# EAGLE board LFO_CGS (EAGLE 7.3.0)

Size 39.3 x 106.5 mm. Coordinates in mm from the lower left corner, seen from the top.
Outline: 0,0 39.3,0 39.3,106.5 0,106.5 0,0
Copper layers (1*16): Top 0.035mm / dielectric 1.5mm / Bottom 0.035mm
Design rules "default": minimum track width 10mil, minimum drill 24mil, track to track 8mil, track to pad 8mil, pad to pad 8mil, via to via 8mil, smd to smd 8mil, copper to edge 40mil, drill to drill 8mil, minimum pad ring 10mil, minimum via ring 8mil, stop-mask expansion 4mil, vias tented up to drill 0mil, thermal gap 10mil

## Footprints (pad centres in the part's own frame; a part is rotated, then mirrored left to right if it is on the bottom)
C025-025X050 = drill 0.813 octagon: 1 -1.27,0; 2 1.27,0
E2,5-6 = drill 0.813 pad 1.6: + -1.27,0 | drill 0.813 pad 1.6 octagon: - 1.27,0
DO35-7 = drill 0.813: A 3.81,0 | drill 0.813 square: C -3.81,0
LED3MM = drill 0.9: A -1.27,0 | drill 0.9 square: K 1.27,0
DO41-1 = drill 0.9: A 1.27,0 | drill 0.9 square: C -1.27,0
JK16-03-11 = drill 0.8: P$1 -2.54,0; P$2 2.54,0
WQP-PJ301M-12_JACK = drill 1.1: P$1_TIP 0,5; P$2_SWITCH 0,-3.5; P$3_SLEEVE 0,-6.5
VERTICAL_RESISTOR = drill 0.813 octagon: 1 -1.27,0; 2 1.27,0
EURO_PWR_HEADER_FAT = drill 1.016 pad 1.88 octagon: 1 -5.08,-1.27; 2 -5.08,1.27; 3 -2.54,-1.27; 4 -2.54,1.27; 5 0,-1.27; 6 0,1.27; 7 2.54,-1.27; 8 2.54,1.27; 9 5.08,-1.27; 10 5.08,1.27
TO92 = drill 0.813 octagon: 1 1.27,0; 2 0,1.905; 3 -1.27,0
DIL14 = drill 0.813 long: 1 -7.62,-3.81; 2 -5.08,-3.81; 3 -2.54,-3.81; 4 0,-3.81; 5 2.54,-3.81; 6 5.08,-3.81; 7 7.62,-3.81; 8 7.62,3.81; 9 5.08,3.81; 10 2.54,3.81; 11 0,3.81; 12 -2.54,3.81; 13 -5.08,3.81; 14 -7.62,3.81
DIL08 = drill 0.813 pad 1.27 long: 1 -3.81,-3.81; 2 -1.27,-3.81; 3 1.27,-3.81; 4 3.81,-3.81; 5 3.81,3.81; 6 1.27,3.81; 7 -1.27,3.81; 8 -3.81,3.81
9MM_SNAP-IN_POT = drill 1.1 square: 1 -2.5,-7 | drill 1.1 octagon: 2 0,-7; 3 2.5,-7 | drill 2.1 square: CHASSIS1 -4.5,0; CHASSIS2 4.5,0

## Placement (x,y rotation side)
C1  47n  [C025-025X050]  5.08,35.56 180 top
C2  100n  [C025-025X050]  5.08,53.34 0 top
C3  100n  [C025-025X050]  12.7,53.34 0 top
C4  100n  [C025-025X050]  26.67,53.34 0 top
C5  100n  [C025-025X050]  33.02,53.34 0 top
C6  [E2,5-6]  33.02,93.98 180 top
C7  [E2,5-6]  8.89,92.71 180 top
D1  1N4148  [DO35-7]  7.62,66.04 180 top
D2  1N4148  [DO35-7]  29.21,66.04 0 top
D3  LED3MM  [LED3MM]  15.24,92.71 0 top
D4  [DO41-1]  33.02,88.9 0 top
D5  [DO41-1]  8.89,87.63 0 top
F1  JK16-03-11  [JK16-03-11]  33.02,99.06 0 top
F2  JK16-03-11  [JK16-03-11]  7.62,99.06 180 top
PULSE  THONKICONNNEW  [WQP-PJ301M-12_JACK]  17.78,22.86 0 top
R1  150k  [VERTICAL_RESISTOR]  19.05,53.34 0 top
R2  2k2  [VERTICAL_RESISTOR]  20.32,31.75 0 top
R3  1k  [VERTICAL_RESISTOR]  5.08,30.48 0 top
R4  100k  [VERTICAL_RESISTOR]  29.21,35.56 0 top
R5  4k7  [VERTICAL_RESISTOR]  3.81,86.36 270 top
R6  10k  [VERTICAL_RESISTOR]  13.97,35.56 0 top
R7  1k  [VERTICAL_RESISTOR]  27.94,31.75 0 top
R8  1k  [VERTICAL_RESISTOR]  22.23,92.71 0 top
R9  1k  [VERTICAL_RESISTOR]  27.94,21.59 180 top
R10  100k  [VERTICAL_RESISTOR]  35.56,83.82 270 top
R11  47k  [VERTICAL_RESISTOR]  12.7,31.75 0 top
R12  100k  [VERTICAL_RESISTOR]  21.59,36.2 180 top
R13  1k  [VERTICAL_RESISTOR]  15.24,86.36 180 top
R14  1k  [VERTICAL_RESISTOR]  7.62,21.59 0 top
R15  1k  [VERTICAL_RESISTOR]  21.59,86.36 0 top
SQUARE  THONKICONNNEW  [WQP-PJ301M-12_JACK]  7.62,7.62 0 top
SV1  EURO_POWER_HEADERFAT_PADS  [EURO_PWR_HEADER_FAT]  19.05,100.33 0 top
T1  BC547  [TO92]  27.94,86.36 0 top
TRI/SAW  THONKICONNNEW  [WQP-PJ301M-12_JACK]  19.05,7.62 0 top
U1  TL074_  [DIL14]  11.43,44.45 0 top
U2  TL072_  [DIL08]  29.21,44.45 0 top
VARI  THONKICONNNEW  [WQP-PJ301M-12_JACK]  30.48,7.62 0 top
VR1_SPEED  B100k  [9MM_SNAP-IN_POT]  7.62,76.2 0 top
VR2_SHAPE  B500k  [9MM_SNAP-IN_POT]  29.21,76.2 0 top
VR2_VARI  B100k  [9MM_SNAP-IN_POT]  19.05,62.23 0 top

## Library data of the parts
C1-C7 = resistor
D1 D2 PULSE R1-R15 SQUARE SV1 T1 TRI/SAW U1 U2 VARI VR1_SPEED VR2_SHAPE VR2_VARI = MusicThingModular
D3-D5 = gm-diodes
F1 F2 = ptc-littlefuse

## Nets
GND: C2.1 C3.2 C4.1 C5.2 C6.- C7.+ D3.K D4.C D5.A PULSE.P$3_SLEEVE R3.1 R5.1 R8.1 R12.1 R15.1 SQUARE.P$3_SLEEVE SV1.3 SV1.4 SV1.5 SV1.6 SV1.7 SV1.8 T1.3 TRI/SAW.P$3_SLEEVE U1.3 U1.9 U1.12 VARI.P$3_SLEEVE
N$1: R1.1 U1.10
N$2: R1.2 R2.2 U1.8 VR1_SPEED.3
N$3: PULSE.P$1_TIP R2.1 R3.2
N$4: R5.2 VR1_SPEED.1
N$5: D1.A D2.C VR1_SPEED.2
N$6: D1.C VR2_SHAPE.1
N$7: D2.A VR2_SHAPE.3
N$8: C1.1 R6.2 U1.2
N$9: R6.1 VR2_SHAPE.2
N$10: C1.2 R4.2 R7.2 R10.1 T1.2 U1.1 VR2_VARI.3
N$11: R7.1 R8.2 TRI/SAW.P$1_TIP
N$12: R11.1 U1.14
N$13: R10.2 U1.13
N$14: R11.2 R12.2 U1.5
N$15: R14.2 U1.6 U1.7 VR2_VARI.1
N$16: R14.1 R15.2 SQUARE.P$1_TIP
N$17: D3.A R13.2
N$18: U2.3 VR2_VARI.2
N$19: R9.2 U2.1 U2.2
N$20: R9.1 VARI.P$1_TIP
N$21: R13.1 T1.1
N$22: F2.P$1 SV1.1
N$23: F1.P$1 SV1.9
N$24: C3.1 C5.1 C7.- D5.C F2.P$2 U1.11 U2.4
N$25: SV1.2
N$28: C2.2 C4.2 C6.+ D4.A F1.P$2 U1.4 U2.8
N$29: SV1.10

## Tracks (layer width: path | path; a pad name or v marks a point on that pad's centre or on a via)
GND  (27 unrouted)
N$1  (1 unrouted)
N$2  (3 unrouted)
N$3  (2 unrouted)
N$4  (1 unrouted)
N$5  (2 unrouted)
N$6  (1 unrouted)
N$7  (1 unrouted)
N$8  (2 unrouted)
N$9  (1 unrouted)
N$10  (6 unrouted)
N$11  (2 unrouted)
N$12  (1 unrouted)
N$13  (1 unrouted)
N$14  (2 unrouted)
N$15  (3 unrouted)
N$16  (2 unrouted)
N$17  (1 unrouted)
N$18  (1 unrouted)
N$19  (2 unrouted)
N$20  (1 unrouted)
N$21  (1 unrouted)
N$22  (1 unrouted)
N$23  (1 unrouted)
N$24  (6 unrouted)
N$28  (6 unrouted)